# Altium PCB eos26_motherboard_heater_adapter_banana.PcbDoc
Units mil, origin at the board's own origin, x right, y up, seen from the top; angles counter-clockwise.
Board outline 5600 x 1600 mil, 2 copper layers (Top Layer, Bottom Layer); 36 components, 17 nets, 100 pads, 153 vias.
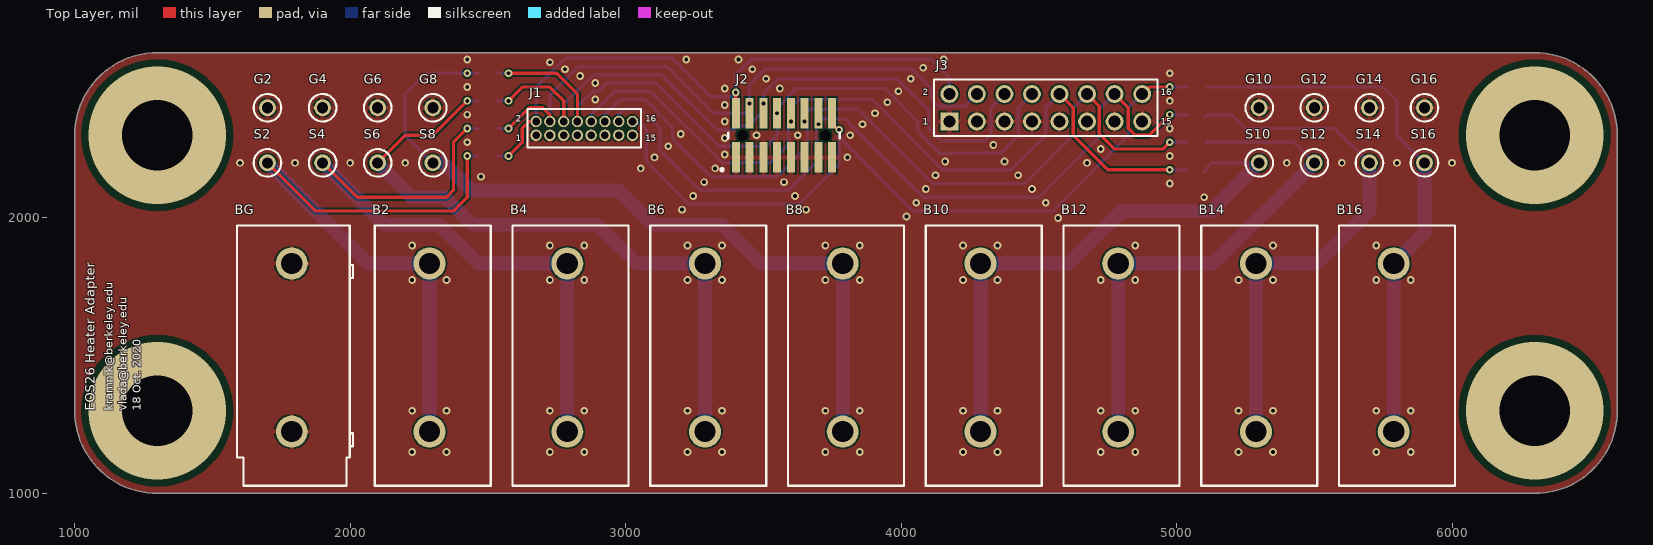
[diagram p0: Top Layer view]
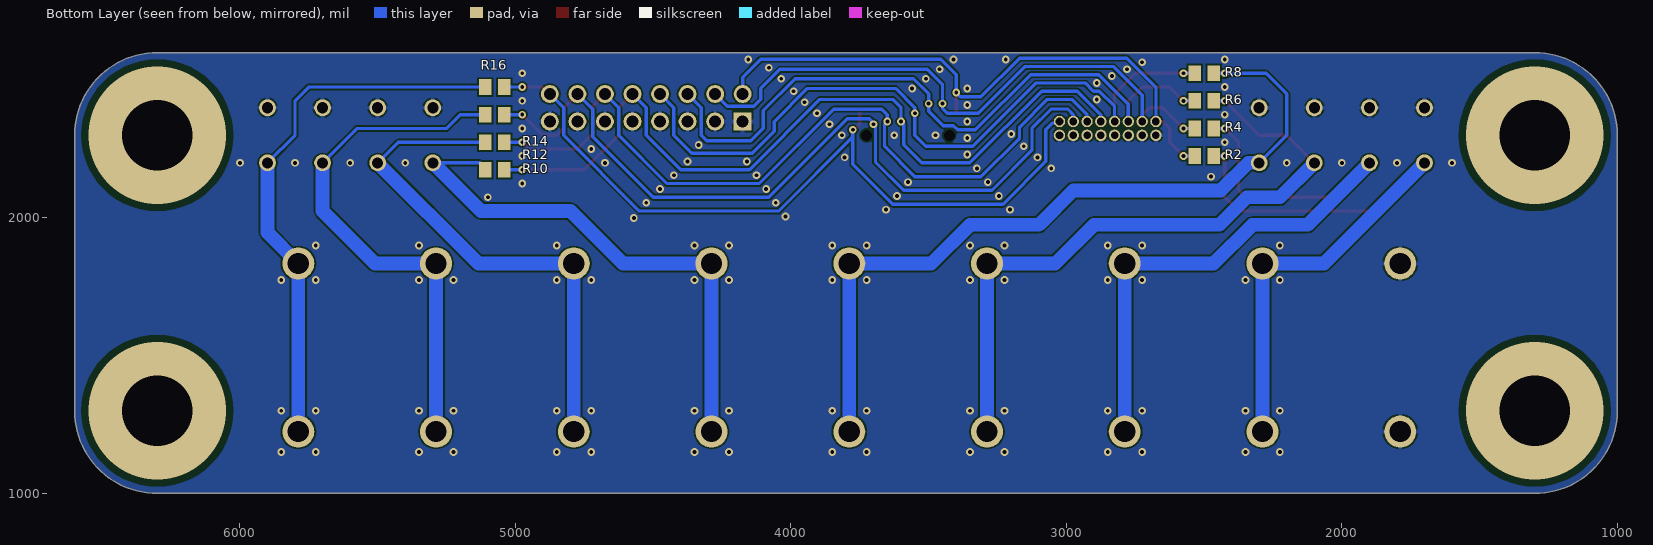
[diagram p1: Bottom Layer view, seen from below]
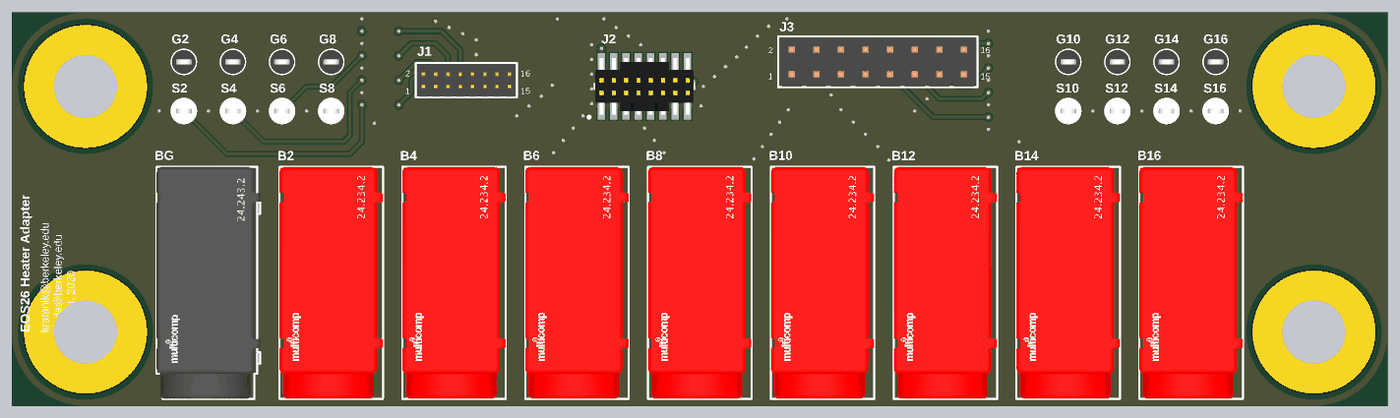
[diagram p2: 3D render of the assembled board from above, using the file's embedded part models]

## Layer stack, top to bottom
Top Solder: solder mask 0.4, Solder Resist, Dk 3.5
Top Layer: signal copper 1.4
Dielectric 1: dielectric 12.6, FR-4, Dk 4.8
Bottom Layer: signal copper 1.4
Bottom Solder: solder mask 0.4, Solder Resist, Dk 3.5

## Board outline
1000,1300 1000,2300 cw(c1300,2300) 1300,2600 6300,2600 cw(c6300,2300) 6600,2300 6600,1300 cw(c6300,1300) 6300,1000 1300,1000 cw(c1300,1300)

## Design rules (kind name [scope] priority, off if disabled: settings)
Clearance Clearance_1 [InNamedPolygon('GND_L01_P002')       Or InNamedPolygon('GND_L02_P000') vs IsVia And Not IsElectrical] p1: gap=25 ignorepadtopadclearanceinfootprint=FALSE
Clearance Clearance_NoNet [InNet('No Net')] p2: gap=12 ignorepadtopadclearanceinfootprint=FALSE
Clearance [All] p3: gap=6 ignorepadtopadclearanceinfootprint=FALSE
HoleSize [All] p1: absolutevalues=TRUE maxlimit=99999 minlimit=1 maxpercent=80.000 minpercent=20.000
MinimumSolderMaskSliver [All] p1 off: minsoldermaskwidth=10
PlaneConnect PlaneConnect_1 [All] p1: planeconnectstyle=Relief reliefexpansion=20 reliefentries=4 reliefconductorwidth=10 reliefairgap=10
PlaneConnect PowerPlaneConnect_GND_Via [IsVia AND InNet('GND')] p2: planeconnectstyle=Direct reliefexpansion=20 reliefentries=4 reliefconductorwidth=10 reliefairgap=10
PolygonConnect PolygonConnect_GND_Via [IsVia AND InNet('GND')] p1: connectstyle=Direct reliefconductorwidth=10 reliefentries=4 polygonreliefangle="90 Angle" airgapwidth=10
PolygonConnect [All] p2: connectstyle=Relief reliefconductorwidth=16 reliefentries=4 polygonreliefangle="90 Angle" airgapwidth=6
RoutingVias [All] p1: holewidth=28 width=50 viastyle="Through Hole" minholewidth=28 minwidth=50 maxholewidth=28 maxwidth=50
SilkToSilkClearance [All] p1: silktosilkclearance=3.94
SilkToSolderMaskClearance [IsPad] p1: minsilkscreentomaskgap=3.94 clearancetoexposedcopper=TRUE
SolderMaskExpansion [All] p1: expansion=4
Width [All] p1: maxlimit=100 minlimit=6 preferedwidth=12 minimp=50.000000 maximp=50.000000 favimp=50.000000
25 further rules are at their usual default settings.

## Components (designator, comment, footprint, x,y, rotation, side; value= is the part's Value field where it differs from the comment)
B2 "24.243.1" FP-24_243_1-MFG 2300,1500 r270 top
B4 "24.243.1" FP-24_243_1-MFG 2800,1500 r270 top
B6 "24.243.1" FP-24_243_1-MFG 3300,1500 r270 top
B8 "24.243.1" FP-24_243_1-MFG 3800,1500 r270 top
B10 "24.243.1" FP-24_243_1-MFG 4300,1500 r270 top
B12 "24.243.1" FP-24_243_1-MFG 4800,1500 r270 top
B14 "24.243.1" FP-24_243_1-MFG 5300,1500 r270 top
B16 "24.243.1" FP-24_243_1-MFG 5800,1500 r270 top
BG "24.243.2" FP-24_243_2-MFG 1800,1500 r90 top
G2 "5001" KSTN-5001 1700,2400 r90 top
G4 "5001" KSTN-5001 1900,2400 r90 top
G6 "5001" KSTN-5001 2100,2400 r90 top
G8 "5001" KSTN-5001 2300,2400 r90 top
G10 "5001" KSTN-5001 5300,2400 r90 top
G12 "5001" KSTN-5001 5500,2400 r90 top
G14 "5001" KSTN-5001 5700,2400 r90 top
G16 "5001" KSTN-5001 5900,2400 r90 top
J1 "62201621121" 62201621121 2850,2325 r0 top
J2 "FTSH-108-02-F-DV" LIBRARYSOURCE=Vault 3575,2300 r0 top
J3 "61301621121" 61301621121 4525,2400 r0 top
R2 "ERJ-6GEY0R00V" RESC2013X70X40NL20T20 2500,2225 r180 bottom
R4 "ERJ-6GEY0R00V" RESC2013X70X40NL20T20 2500,2325 r180 bottom
R6 "ERJ-6GEY0R00V" RESC2013X70X40NL20T20 2500,2425 r180 bottom
R8 "ERJ-6GEY0R00V" RESC2013X70X40NL20T20 2500,2525 r180 bottom
R10 "ERJ-6GEY0R00V" RESC2013X70X40NL20T20 5075,2175 r0 bottom
R12 "ERJ-6GEY0R00V" RESC2013X70X40NL20T20 5075,2275 r0 bottom
R14 "ERJ-6GEY0R00V" RESC2013X70X40NL20T20 5075,2375 r0 bottom
R16 "ERJ-6GEY0R00V" RESC2013X70X40NL20T20 5075,2475 r0 bottom
S2 "5002" KSTN-5002 1700,2200 r90 top
S4 "5002" KSTN-5002 1900,2200 r90 top
S6 "5002" KSTN-5002 2100,2200 r90 top
S8 "5002" KSTN-5002 2300,2200 r90 top
S10 "5002" KSTN-5002 5300,2200 r90 top
S12 "5002" KSTN-5002 5500,2200 r90 top
S14 "5002" KSTN-5002 5700,2200 r90 top
S16 "5002" KSTN-5002 5900,2200 r90 top

## Footprints (in the part's own frame and the unit in brackets; to place one, negate y for a bottom-side part, rotate by r counter-clockwise, add the part's x,y. Pads: shape width x height; smd on the part's side, far side on the other; paste and mask are expansions set on the pad)
61301621121 [mm] "Pin Header, pitch 2.54 mm, THT, Vertical, dual row, 16p"
  rect 1.65x1.65 hole 1.1: 1(-8.89,-1.27)
  round 1.65 hole 1.1: 2(-8.89,1.27) 3(-6.35,-1.27) 4(-6.35,1.27) 5(-3.81,-1.27) 6(-3.81,1.27) 7(-1.27,-1.27) 8(-1.27,1.27) 9(1.27,-1.27) 10(1.27,1.27) 11(3.81,-1.27) 12(3.81,1.27) 13(6.35,-1.27) 14(6.35,1.27) 15(8.89,-1.27) 16(8.89,1.27)
  silkscreen extent -10.31,-2.62 10.31,2.62, body extent -10.16,-2.54 10.16,2.54, height 8.59
62201621121 [mm] "Pin Header, pitch 1.27 mm, THT, Vertical, dual row, 16p"
  round 1.05 hole 0.7: 1(-4.445,-0.635) 2(-4.445,0.635) 3(-3.175,-0.635) 4(-3.175,0.635) 5(-1.905,-0.635) 6(-1.905,0.635) 7(-0.635,-0.635) 8(-0.635,0.635) 9(0.635,-0.635) 10(0.635,0.635) 11(1.905,-0.635) 12(1.905,0.635) 13(3.175,-0.635) 14(3.175,0.635) 15(4.445,-0.635) 16(4.445,0.635)
  silkscreen extent -5.23,-1.78 5.23,1.78, body extent -5.08,-1.7 5.08,1.7, height 5.33
FP-24_243_1-MFG [mm]
  round 2.95 hole 1.95 paste-1000 mask+0: 1(-8.5,-0.3) 1(7,-0.3)
  silkscreen extent -12,-5.35 12,5.35, body extent -12.1,-5.45 12.1,5.45, height 0.25
FP-24_243_2-MFG [mm]
  round 2.95 hole 1.95 paste-1000 mask+0: 1(-7,0.3) 1(8.5,0.3)
  silkscreen extent -12,-5.35 12,5.35, body extent -12.1,-5.45 12.1,5.45, height 0.25
KSTN-5001 [mm] "Test Point, Through Hole, Dia 2.54mm"
  round 1.55 hole 1.016: 1(0,0)
  silkscreen extent -1.27,-1.27 1.27,1.27, body extent -1.25,-1.25 1.25,1.25, height 4.62
KSTN-5002 [mm] "Test Point, Through Hole, Dia 2.54mm"
  round 1.55 hole 1.016: 1(0,0)
  silkscreen extent -1.27,-1.27 1.27,1.27, body extent -1.25,-1.25 1.25,1.25, height 4.62
LIBRARYSOURCE=Vault [mm]
  rect 0.74x2.79 smd paste+0 mask+0: 1(-4.445,-2.035) 2(-4.445,2.035) 3(-3.175,-2.035) 4(-3.175,2.035) 5(-1.905,-2.035) 6(-1.905,2.035) 7(-0.635,-2.035) 8(-0.635,2.035) 9(0.635,-2.035) 10(0.635,2.035) 11(1.905,-2.035) 12(1.905,2.035) 13(3.175,-2.035) 14(3.175,2.035) 15(4.445,-2.035) 16(4.445,2.035)
  round 0.1 hole 1.02 unplated: H1(-3.81,0) H2(3.81,0)
  silkscreen extent -5.84,-3.3 5.15,0.27, body extent -5.25,-3.53 5.25,3.53, height 0.25
RESC2013X70X40NL20T20 [mm] "Chip Resistor, 2-Leads, Body 2.00x1.25mm, IPC Medium Density"
  rect 1.15x1.45 smd: 1(-0.875,0) 2(0.875,0)
  body extent -1.1,-0.72 1.1,0.72, height 0.7

## Part data
B2 B4 B6 B8 B10 B12 B14 B16: library part CMP-12400-000001-1, "RECEPTACLE, 20A, 4MM, PCB, SOLDER, RED", Current Rating=24A, Manufacturer=Multicomp, Voltage Rating=60V, Automotive=No, Category=Conn, ComponentLink2Description=Datasheet, ComponentLink2URL=https://datasheet.octopart.com/24.243.1-Multicomp-datasheet-38887736.pdf, Conn Orientation=Horizontal, Contact Material=Silver, Device Class L1=Connectors, Device Class L2=unset, Device Class L3=unset, Height=13mm, Is Female=yes, Lead Free=Yes, Manufacturer Part Number=24.243.1, Number Of Contacts=1, Octopart=https://octopart.com/24.243.1-multicomp-57101049, Package=24.243.1, RoHS=TRUE
BG: library part CMP-12400-000002-1, "RECEPTACLE, 20A, 4MM, PCB, SOLDER, BLACK", Current Rating=24A, Manufacturer=Multicomp, Voltage Rating=60V, Automotive=No, Category=Conn, ComponentLink2Description=Datasheet, ComponentLink2URL=https://datasheet.octopart.com/24.243.2-Multicomp-datasheet-38887736.pdf, Conn Orientation=Horizontal, Contact Material=Silver, Device Class L1=Connectors, Device Class L2=unset, Device Class L3=unset, Height=13mm, Is Female=yes, Lead Free=Yes, Manufacturer Part Number=24.243.2, Number Of Contacts=1, Octopart=https://octopart.com/24.243.2-multicomp-57101050, Package=24.243.2, RoHS=TRUE
G2 G4 G6 G8 G10 G12 G14 G16: library part CMP-2000-05181-1, "Test Point, Black, 1-Pin THD, RoHS, Bulk", Alternate Color="5004K-ND / -TESTPOINTPCMINI.040\"DYELLOW / 5003K-ND / -TESTPOINTPCMINI.040\"DORANGE / 5002K-ND / -TESTPOINTPCMINI.040\"DWHITE / 5000K-ND / -TESTPOINTPCMINI.040\"DRED", Color=Black, Manufacturer=Keystone, Standard Package=100, Catalog Drawings=5000Series, Category=TestandMeasurement, Datasheet URL=https://ciiva.com/datasheet-click-2917627?src=ciiva&sig=bd195616, Datasheet Version="Rev. G, 12/2008", Family=TestPoints, Kits="DKTGRS232C-KIT-ND / -TTLCONVERTER", Manufacturer URL=http://www.keyelco.com/, Material=Base,Nylon46,UL94V-0, Mounting Type="0.040\"(1.02mm)HoleDiameter", Online Catalog=ColorCodedTestPoints, Other Names=5001K, Packaging=Bulk, RoHS Information=RoHSComplianceStatement, Series=THM, Terminal="0.010\"x0.020\"(0.25mmx0.51mm)PhosphorBronzeWire,SilverPlated", Type=PCTestPoint,Miniature
J1: library part CMP-1502-00950-1, "THT Vertical Pin Header WR-PHD, Pitch 1.27 mm, Dual Row, 16 pins", Contact Resistance=20mOhm, Manufacturer="Wurth Elektronik", Operating Temperature=-40to105degC, Rated Current=1A, Withstanding Voltage=500VAC, Working Voltage=100VAC, Datasheet URL=https://katalog.we-online.de/em/datasheet/62201621121.pdf, Gender=Male, Manufacturer URL=http://www.we-online.de, Mounting Technology=THT, Orientation=Vertical, Package Reference=62201621121, Packaging=Box, Part Number=62201621121, Pin Number=16, Pitch=1.27mm, Publisher=WurthElektronik, Row Number=Dual
J2: library part FP-FTSH-108-02-F-DV, "CONN HEADER SMD 16POS 1.27MM", Current Rating=3.4A, Manufacturer=Samtec, Temperature="-55°C to +125°C", Temperature Range High=+125°C, Temperature Range Low=-55°C, Automotive=No, Category=Conn, ComponentLink2Description=Datasheet, ComponentLink2URL=http://suddendocs.samtec.com/prints/ftsh-1xx-xx-xxx-dv-xxx-xxx-mkt.pdf, Conn Gender=Male, Conn Orientation=Vertical, Contact Material=Gold,Nickel, Device Class L1=Connectors, Device Class L2="Headers and Wire Housings", Device Class L3=unset, Digikey Description="CONN HEADER SMD 16POS 1.27MM", Footprint Url=http://suddendocs.samtec.com/prints/ftsh-1xx-xx-xxx-dv-xxx-footprint.pdf, Height=5.09mm, Lead Free=Yes, Manufacturer Part Number=FTSH-108-02-F-DV, Mouser Description="Conn Unshrouded Header HDR 16 POS 1.27mm Solder ST SMD Tube", Number Of Contacts=16, Number Of Rows=2, Octopart=https://octopart.com/ftsh-108-02-f-dv-samtec-10605893, Package=FTSH-108-02-F-DV, Pitch=1.27mm, RoHS=TRUE, Standoff Height=0.46mm
J3: library part CMP-1502-01097-1, "THT Vertical Pin Header WR-PHD, Pitch 2.54 mm, Dual Row, 16 pins", Contact Resistance=20mOhm, Manufacturer="Wurth Elektronik", Operating Temperature=-40to105degC, Rated Current=3A, Withstanding Voltage=500VAC, Working Voltage=250VAC, Datasheet URL=https://katalog.we-online.de/em/datasheet/6130xx21121.pdf, Gender=Male, Manufacturer URL=http://www.we-online.de, Mounting Technology=THT, Orientation=Vertical, Package Reference=61301621121, Packaging=Bag, Part Number=61301621121, Pin Number=16, Pitch=2.54mm, Publisher=WurthElektronik, Row Number=Dual
R2 R4 R6 R8 R10 R12 R14 R16: library part CMP-1665-00002-5, "Chip Resistor, 0 Ohm, +/- 1%, 0.125 W, -55 to 155 degC, 0805 (2012 Metric), RoHS, Tape and Reel", Case/Package=0805, Case Code (Metric)=2012, Max Operating Temperature="155 degC", Min Operating Temperature="-55 degC", Package Quantity=5000, Resistance="0 Ohm", Tolerance=5%, Case Code (Imperial)=0805, ComponentLink1Description="Manufacturer URL", ComponentLink1URL=http://www.panasonic.com/, ComponentLink2Description=Datasheet, ComponentLink2URL=http://industrial.panasonic.com/cdbs/www-data/pdf/RDA0000/AOA0000C84.pdf, DatasheetVersion=03/2015, Height="0.6 mm", Length="2 mm", Mounting Technology="Surface Mount", PackageDescription="2-Pin Surface Mount Device, Body 2 x 1.25 mm", Packaging="Tape and Reel", PartNumber=ERJ-6GEY0R00V, Radiation Hardening=No, REACH SVHC="No SVHC", RoHSCompliant=True, Width="1.25 mm"
S2 S4 S6 S8 S10 S12 S14 S16: library part CMP-2000-05182-1, "Test Point, White, 1-Pin THD, RoHS, Bulk", Color=White, Manufacturer=KeystoneElectronics, Brand=KeystoneElectronics, Contact Material=PhosphorBronze, Datasheet URL=https://ciiva.com/datasheet-click-2917627?src=ciiva&sig=bd195616, Datasheet Version="Rev. G, 12/2008", Length=7.62mm, Manufacturer URL=http://www.keyelco.com/, Material=Nylon, Mounting Hole Size=1mm, Outside Diameter=2.54mm, Packaging=Bulk, Plating=Silver, Product=TestPoints, Product Category=CircuitBoardHardware-PCB, RoHS=True, Type=Miniature

## Via types
v1: diameter 28, hole 14, Top Layer to Bottom Layer, tented both sides, 149 vias
v2: diameter 500, hole 257, Top Layer to Bottom Layer, 4 vias

## Nets (pads, with @x,y where several pads share a name; then routed paths per layer and width w, separated by ;. In a path a pad name is that pad's centre, name@x,y a point inside that pad or via, vN(x,y) a via of type N, cw(c..) or ccw(c..) an arc to the next point about the centre after c; other vN are vias at no path point)
GND: BG.1 G2.1 G4.1 G6.1 G8.1 G10.1 G12.1 G14.1 G16.1 J1.1 J1.3 J1.5 J1.7 J1.9 J1.11 J1.13 J1.15 J2.1 J2.3 J2.5 J2.7 J2.9 J2.11 J2.13 J2.15 J3.1 J3.3 J3.5 J3.7 J3.9 J3.11 J3.13 J3.15
  other v1: 2225,1150 2350,1150 2725,1150 2850,1150 3225,1150 3350,1150 3725,1150 3850,1150 4225,1150 4350,1150 4725,1150 4850,1150 5225,1150 5350,1150 5725,1150 5850,1150 2225,1300 2350,1300 2725,1300 2850,1300 3225,1300 3350,1300 3725,1300 3850,1300 4225,1300 4350,1300 4725,1300 4850,1300 5225,1300 5350,1300 5725,1300 5850,1300 2225,1775 2350,1775 2725,1775 2850,1775 3225,1775 3350,1775 3725,1775 3850,1775 4225,1775 4350,1775 4725,1775 4850,1775 5225,1775 5350,1775 5725,1775 5850,1775 2225,1900 2725,1900 2850,1900 3225,1900 3350,1900 3725,1900 3850,1900 4225,1900 4350,1900 4850,1900 5350,1900 5725,1900 4570,2000 4020,2005 3205,2030 3655,2030 4055,2055 4525,2055 5100,2075 3245,2080 3615,2080 4090,2105 4475,2105 4975,2125 3285,2130 3575,2130 2475,2150 4125,2155 4425,2155 3055,2180 3325,2180 1600,2200 1800,2200 2000,2200 2200,2200 4675,2200 5400,2200 5600,2200 5800,2200 6000,2200 4160,2205 4375,2205 3105,2220 3805,2220 4975,2225 3360,2230 4725,2250 3155,2260 4335,2265 2425,2275 3360,2290 3475,2300 3625,2300 3815,2300 3200,2305 4975,2325 3860,2340 3360,2350 2425,2375 3905,2380 3360,2410 3950,2420 4975,2425 2890,2430 3990,2460 3360,2470 3560,2470 2425,2475 2890,2490 3510,2505 4035,2505 2835,2515 4975,2525 2780,2540 3460,2540 4080,2545 2725,2565 2425,2575 3220,2575 3410,2575 4155,2575
SIGNAL_PIN_2: J1.2 J2.2 J3.2 R2.1 | length 2204.7
  Top Layer w12: v1(2575,2225) 2625,2275 2625,2325 2650,2350 J1.2 ; J2.2 v1(3400,2455)
  Bottom Layer w12: R2.1 v1(2575,2225) ; J1.2 2675,2475 2780,2580 3170,2580 3310,2440 3385,2440 v1(3400,2455) 3400,2520 3456,2576 4109,2576 4175,2510 J3.2
SIGNAL_PIN_2_JMP: B2.1 R2.2 S2.1 | length 2358.5
  Top Layer w12: S2.1 1875,2025 2375,2025 2425,2075 v1(2425,2225)
  Bottom Layer w12: v1(2425,2225) R2.2
  Bottom Layer w50: S2.1 2065.35,1834.65 2288.19,1834.65 B2.1@2288.19,1224.41
SIGNAL_PIN_4: J1.4 J2.4 J3.4 R4.1 | length 2230.9
  Top Layer w12: v1(2575,2325) 2650,2400 2700,2400 2725,2375 J1.4
  Bottom Layer w12: R4.1 v1(2575,2325) ; J1.4 2725,2445 2830,2550 3150,2550 3320,2380 3432.3,2380 3450,2397.7 v1(3450,2415) 3450,2485 3505,2540 4040,2540 4110,2470 4110,2430 4134.48,2405.52 4230.52,2405.52 J3.4
SIGNAL_PIN_4_JMP: B4.1 R4.2 S4.1 | length 2473.2
  Top Layer w12: S4.1 2025,2075 2350,2075 2375,2100 2375,2275 v1(2425,2325)
  Bottom Layer w12: v1(2425,2325) R4.2
  Bottom Layer w50: S4.1 2125,1975 2325,1975 2465.35,1834.65 2788.19,1834.65 B4.1@2788.19,1224.41
SIGNAL_PIN_6: J1.6 J2.6 J3.6 R6.1 | length 2520.6
  Top Layer w12: v1(2575,2425) 2625,2475 2725,2475 2775,2425 J1.6
  Bottom Layer w12: R6.1 v1(2575,2425) ; J1.6 2775,2412.72 2882.28,2520 3130,2520 3330,2320 3395,2320 3410,2335 3447.7,2335 3500,2387.3 v1(3500,2415) 3500,2450 3555,2505 3985,2505 4100,2390 4100,2325 4145,2280 4305,2280 4325,2300 4325,2400 J3.6
SIGNAL_PIN_6_JMP: B6.1 R6.2 S6.1 | length 2408.5
  Top Layer w12: S6.1 2200,2300 2300,2300 v1(2425,2425)
  Bottom Layer w12: v1(2425,2425) R6.2
  Bottom Layer w50: S6.1 2225,2075 2345,2075 2445,1975 2900,1975 3040.35,1834.65 3288.19,1834.65 B6.1@3288.19,1224.41
SIGNAL_PIN_8: J1.8 J2.8 J3.8 R8.1 | length 2668
  Top Layer w12: v1(2575,2525) 2750,2525 2825,2450 J1.8
  Bottom Layer w12: R8.1 v1(2575,2525) ; J1.8 2825,2404.77 2880.23,2460 2901.77,2460 2931.77,2490 3110,2490 3340,2260 3510,2260 3550,2300 v1(3550,2380.12) 3550,2400 3620,2470 3940,2470 4060,2350 4060,2315 4140,2235 4360,2235 4425,2300 4425,2400 J3.8
SIGNAL_PIN_8_JMP: B8.1 R8.2 S8.1 | length 2862.8
  Top Layer w12: S8.1 S8.1@2325,2200
  Bottom Layer w12: S8.1 2200,2300 2200,2450 2275,2525 v1(2425,2525) R8.2
  Bottom Layer w50: S8.1 2340,2200 2440,2100 2975,2100 3100,1975 3350,1975 3490.35,1834.65 3788.19,1834.65 B8.1@3788.19,1224.41
SIGNAL_PIN_10: J1.10 J2.10 J3.10 R10.1 | length 2952.5
  Top Layer w12: J3.10 4625,2400 4625,2300 4750,2175 v1(4975,2175)
  Bottom Layer w12: J1.10 2875,2375 2960,2460 3090,2460 3350,2200 3525,2200 3590,2265 3590,2340 v1(3600,2350) 3600,2400 3630,2430 3895,2430 4150,2175 4400,2175 4525,2300 4525,2400 J3.10 ; v1(4975,2175) R10.1
SIGNAL_PIN_10_JMP: B10.1 R10.2 S10.1 | length 1991.1
  Bottom Layer w12: R10.2@5100,2165.55 R10.2 5109.45,2180.91 5128.54,2200 S10.1 S10.1@5297.54,2197.54
  Bottom Layer w50: B10.1@4288.19,1224.41 4288.19,1834.65 4609.65,1834.65 4800,2025 5125,2025 S10.1@5297.54,2197.54
SIGNAL_PIN_12: J1.12 J2.12 J3.12 R12.1 | length 2942.5
  Top Layer w12: J3.12 4719.48,2405.52 4719.48,2305.52 4775,2250 4950,2250 v1(4975,2275)
  Bottom Layer w12: J1.12 2925,2375 2980,2430 3070,2430 3170,2330 3170,2290 3310,2150 3550,2150 3660,2260 3660,2340 v1(3650,2350) 3650,2375 3670,2395 3845,2395 4115,2125 4450,2125 4625,2300 4625,2400 J3.12 ; v1(4975,2275) R12.1
SIGNAL_PIN_12_JMP: B12.1 R12.2 S12.1 | length 1895
  Bottom Layer w12: R12.2 5425,2275 S12.1
  Bottom Layer w50: B12.1@4788.19,1224.41 4788.19,1834.65 5134.65,1834.65 S12.1
SIGNAL_PIN_14: J1.14 J2.14 J3.14 R14.1 | length 2924.1
  Top Layer w12: J3.14 4825,2400 4825,2325 4850,2300 4900,2300 v1(4975,2375)
  Bottom Layer w12: J1.14 2975,2375 2995.43,2395.43 3054.57,2395.43 3125,2325 3125,2245 3270,2100 3590,2100 3692.92,2202.92 3692.92,2337.92 3715,2360 3795,2360 4080,2075 4500,2075 4719.48,2294.48 4719.48,2394.48 J3.14 ; v1(4975,2375) R14.1
  other v1: 3700,2340
SIGNAL_PIN_14_JMP: B14.1 R14.2 S14.1 | length 1966.6
  Bottom Layer w12: R14.2@5100,2365.55 R14.2 ; S14.1 5575,2325 5250,2325 5200,2375 R14.2@5115.35,2375 ; R14.2 R14.2@5115.35,2375 ; R14.2 5109.45,2369.09 R14.2@5115.35,2375
  Bottom Layer w50: B14.1@5288.19,1224.41 5288.19,1834.65 5509.65,1834.65 5700,2025 S14.1
SIGNAL_PIN_16: J1.16 J2.16 J3.16 R16.1 | length 2822.6
  Top Layer w12: J2.16 3750,2339.76 3766.7,2323.06 3771.94,2323.06 v1(3775,2320) ; J3.16 4900,2475 v1(4975,2475)
  Bottom Layer w12: J1.16 3030.61,2344.39 3050.61,2344.39 3075,2320 3075,2205 3230,2050 3630,2050 3775,2195 3775,2295 ; v1(3775,2320) 3775,2295 ; J3.16 4825,2400 4825,2300 4550,2025 4045,2025 3775,2295 ; v1(4975,2475) R16.1
SIGNAL_PIN_16_JMP: B16.1 R16.2 S16.1 | length 1999.6
  Bottom Layer w12: R16.2 5750,2475 5800,2425 5800,2300 S16.1
  Bottom Layer w50: B16.1@5788.19,1224.41 5788.19,1834.65 5900,1946.46 S16.1
pads on no net: J2.H1 J2.H2
copper on no net:
  other v2: 1300,1300 6300,1300 1300,2300 6300,2300

## Polygon pours and split planes (outlines as drawn)
GND on Bottom Layer "GND_L02_P000" (solid, remove dead copper, pour order 0): 1300,2600 6300,2600 cw(c6300,2300) 6600,2300 6600,1300 cw(c6300,1300) 6300,1000 1300,1000 cw(c1300,1300) 1000,1300 1000,2300 cw(c1300,2300)
GND on Top Layer "GND_L01_P002" (solid, remove dead copper, pour order 2): 1300,2600 6300,2600 cw(c6300,2300) 6600,2300 6600,1300 cw(c6300,1300) 6300,1000 1300,1000 cw(c1300,1300) 1000,1300 1000,2300 cw(c1300,2300)

## Silkscreen, mask and mechanical layers (free items; w line width, h text height)
Top Overlay:
  text "EOS26 Heater Adapter" at 1085.57,1300 h60 r90
  text "kramnik@berkeley.edu / vlada@berkeley.edu / 18 Oct. 2020" at 1250,1300 h50 r90
Mechanical 1:
  the board outline again, w1

## Text inside footprints (layer, text, board x,y; h text height)
J1: Top Overlay "1" at 2601.6,2269.88 h40; Top Overlay "2" at 2601.57,2340.75 h40; Top Overlay "16" at 3070.87,2340.75 h40; Top Overlay "15" at 3070.87,2269.88 h40
J3: Top Overlay "16" at 4943.11,2435.43 h40; Top Overlay "15" at 4943.11,2329.13 h40; Top Overlay "1" at 4079.36,2329.13 h40; Top Overlay "2" at 4079.33,2435.43 h40